# EAGLE board nightlight (EAGLE 6.6.0)
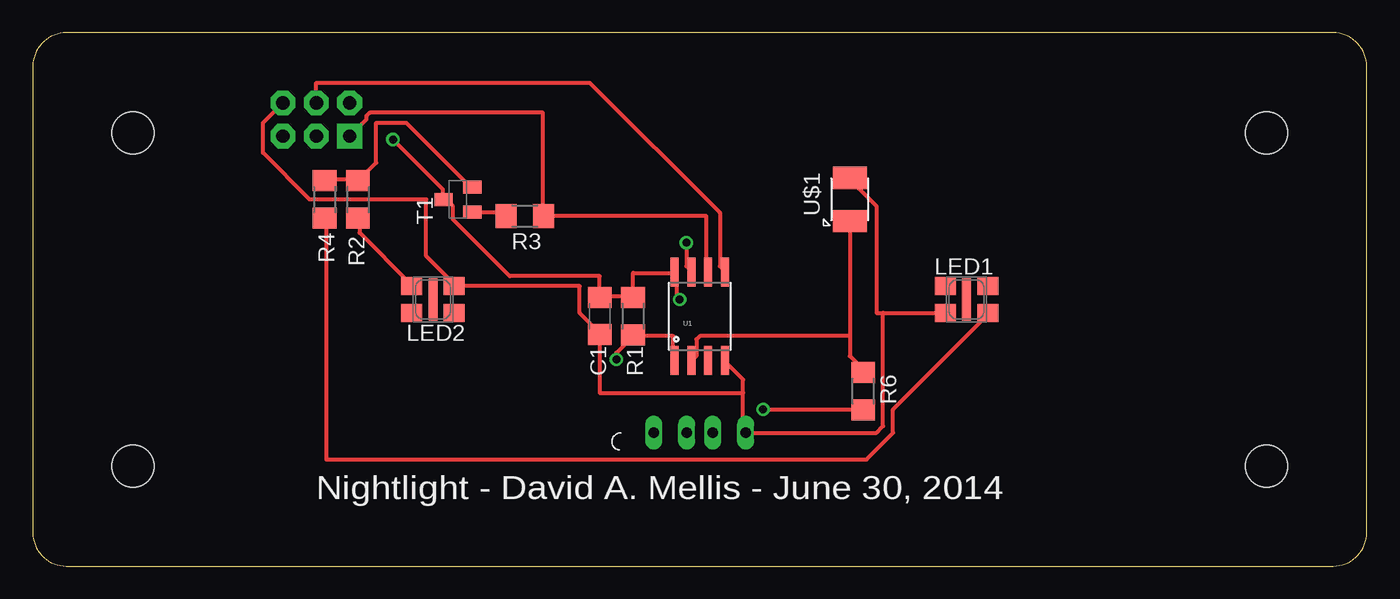
[diagram p0: board, top side]
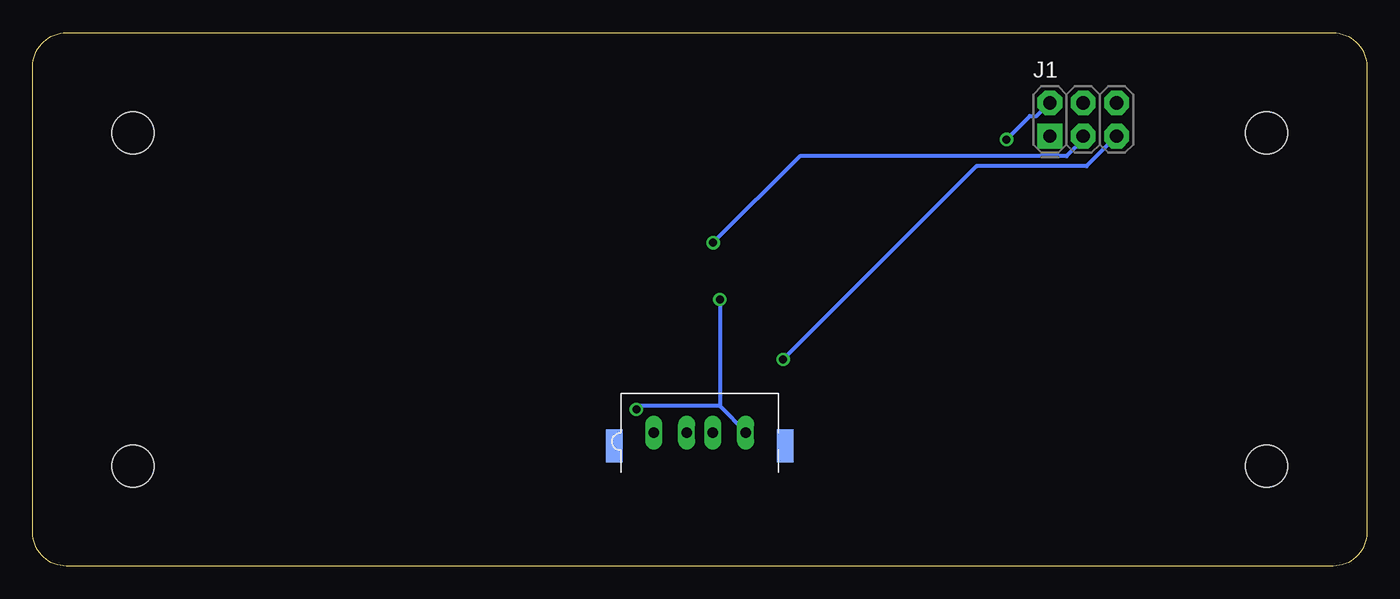
[diagram p1: board, bottom side, seen from below]

Size 101.6 x 40.64 mm. Coordinates in mm from the lower left corner, seen from the top.
Outline: 99.06,40.64 2.54,40.64 arc90 0,38.1 0,2.54 arc90 2.54,0 99.06,0 arc90 101.6,2.54 101.6,38.1 arc90 99.06,40.64
Copper layers (1*16): Top 0.035mm / dielectric 1.5mm / Bottom 0.035mm
Design rules "default *": minimum track width 12mil, minimum drill 24mil, track to track 17mil, track to pad 17mil, pad to pad 17mil, via to via 17mil, smd to smd 8mil, copper to edge 40mil, drill to drill 8mil, minimum pad ring 10mil, minimum via ring 8mil, stop-mask expansion 4mil, vias tented up to drill 0mil, thermal gap 10mil
Holes 3.2 mm at 7.62,7.62 7.62,33.02 93.98,33.02 93.98,7.62

## Footprints (pad centres in the part's own frame; a part is rotated, then mirrored left to right if it is on the bottom)
C1206 = smd 1.6 x 1.8: 1 -1.4,0; 2 1.4,0
2X3-NS = drill 1.016 pad 1.88 square: 1 -2.54,-1.27 | drill 1.016 pad 1.88 octagon: 2 -2.54,1.27; 3 0,-1.27; 4 0,1.27; 5 2.54,-1.27; 6 2.54,1.27
USB_A_VERTICAL = drill 0.8 long: D+ -1,0; D- 1,0; GND -3.5,0; VBUS 3.5,0 | smd 1.27 x 2.54: P$1 -6.5,-1; P$2 6.5,-1
ML-E-FAB = smd 1.6 x 1.35: A@1 1.625,-1.025; A@2 1.625,1.025; C@1 -1.625,-1.025; C@2 -1.625,1.025 | smd 0.7 x 3.2: TH 0,0
R1206 = smd 1.6 x 1.803: 1 -1.422,0; 2 1.422,0
SOT23-BEC = smd 1 x 1.4: B -0.95,-1.1; C 0,1.1; E 0.95,-1.1
SO08-EIAJ = smd 0.61 x 2.21: 1 -1.905,-3.378; 2 -0.635,-3.378; 3 0.635,-3.378; 4 1.905,-3.378; 5 1.905,3.353; 6 0.635,3.353; 7 -0.635,3.353; 8 -1.905,3.353
OP580DA = smd 1.7 x 2.6: COLLECTOR -1.65,0; EMITTER 1.65,0

## Placement (x,y rotation side)
C1  1.0uF  [C1206]  43.18,19.05 270 top
J1  AVR_SPI_PRG_6NS  [2X3-NS]  21.59,34.04 0 bottom
JP1  USB_A_VERTICAL  [USB_A_VERTICAL]  50.8,10.16 0 bottom
LED1  ML-EFAB  [ML-E-FAB]  71.12,20.32 0 top
LED2  ML-EFAB  [ML-E-FAB]  30.48,20.32 180 top
R1  10K  [R1206]  45.72,19.05 90 top
R2  24  [R1206]  24.77,27.94 90 top
R3  1K  [R1206]  37.47,26.67 180 top
R4  24  [R1206]  22.23,27.94 90 top
R6  49.9K  [R1206]  63.25,13.34 270 top
T1  [SOT23-BEC]  32.38,27.94 90 top
U1  Tiny85-20-SMT  [SO08-EIAJ]  50.8,19.05 0 top
U$1  PHOTOTRANSISTOR-NPN-OP580AD  [OP580DA]  62.23,27.94 90 top

## Library data of the parts
C1 R1-R4 R6 = rcl
J1 = SparkFun-Connectors
JP1 LED1 LED2 U$1 = LED Light
T1 = transistor
U1 = SparkFun-DigitalIC; PROD_ID: IC-09092

## Nets
GND: C1.2 J1.6 JP1.GND LED1.C@1 LED2.C@1 U1.4 U$1.EMITTER
MISO: J1.1 R3.1 U1.6
MOSI: J1.4 U1.5
N$1: R2.2 R4.2 T1.E
N$2: R3.2 T1.B
N$3: LED2.A@1 R2.1
N$5: LED1.A@1 R4.1
N$7: R6.1 U1.2 U$1.COLLECTOR
RESET: J1.5 R1.1 U1.1
SCK: J1.3 U1.7
VCC: C1.1 J1.2 JP1.VBUS R1.2 R6.2 T1.C U1.8

## Tracks (layer width: path | path; a pad name or v marks a point on that pad's centre or on a via)
GND
  Top 0.305: 64.77,19.3 64.26,19.3 64.26,27.43 62.23,29.46 U$1.EMITTER | 64.77,19.3 69.34,19.3 LED1.C@1 | 54.1,13.21 54.1,10.16 JP1.GND 64.26,10.16 64.77,10.67 64.77,19.3 | 54.1,13.21 54.1,14.22 52.83,15.49 U1.4 | J1.6 17.53,33.78 17.53,31.5 21.08,27.94 29.97,27.94 29.97,23.62 32,21.59 LED2.C@1 32.26,21.34 41.66,21.34 41.66,19.3 43.18,17.78 C1.2 43.18,13.21 54.1,13.21
MISO
  Top 0.305: U1.6 51.31,22.61 51.31,26.67 R3.1 38.86,26.67 38.86,34.54 25.65,34.54 25.4,34.29 25.4,34.04 J1.1
MOSI
  Top 0.305: J1.4 21.59,36.83 42.42,36.83 52.32,26.92 52.32,22.86 52.58,22.61 U1.5
N$1
  Top 0.305: T1.E 33.27,28.96 28.45,33.78 26.16,33.78 26.16,30.73 24.89,29.46 R2.2 24.64,29.46 22.35,29.46 R4.2
N$2
  Top 0.305: T1.B 33.53,26.92 35.81,26.92 35.81,26.67 R3.2
N$3
  Top 0.305: LED2.A@1 28.7,21.59 24.89,25.4 24.89,26.42 R2.1
N$5
  Top 0.305: LED1.A@1 72.64,19.05 65.53,11.94 65.53,10.16 63.5,8.13 22.35,8.13 22.35,26.42 R4.1
N$7
  Top 0.305: U$1.COLLECTOR 62.23,17.53 | 62.23,17.53 62.23,16 63.25,14.99 R6.1 | 62.23,17.53 50.8,17.53 50.55,17.27 50.55,16 50.29,15.75 U1.2
RESET  (via drill 0.61)
  Top 0.305: 45.72,17.53 48.77,17.53 48.77,15.75 U1.1 | 45.72,17.53 44.45,16.26 v44.45,15.75 | 45.72,17.53 R1.1
  Bottom 0.305: v44.45,15.75 29.72,30.48 21.34,30.48 J1.5
SCK  (via drill 0.61)
  Top 0.305: v49.78,24.64 49.78,22.86 50.04,22.61 U1.7
  Bottom 0.305: v49.78,24.64 43.18,31.24 22.86,31.24 21.59,32.51 J1.3
VCC  (via drill 0.61)
  Top 0.305: v55.63,11.94 63.25,11.94 R6.2 | 43.18,20.57 43.18,22.1 36.32,22.1 32,26.42 32,27.43 31.5,27.94 T1.C 31.24,27.94 31.24,28.7 v27.43,32.51 | 43.18,20.57 45.72,20.57 | 43.18,20.57 C1.1 | 45.72,20.57 45.72,22.35 48.77,22.35 U1.8 49.02,22.35 49.02,20.57 v49.28,20.32 | 45.72,20.57 R1.2
  Bottom 0.305: v55.63,11.94 55.37,12.19 49.28,12.19 | 49.28,12.19 47.24,10.16 JP1.VBUS | J1.2 25.15,34.29 25.65,34.29 v27.43,32.51 | v49.28,20.32 49.28,12.19

## Text on the board
tNames: Nightlight - David A. Mellis - June 30, 2014